# Altium PCB ESP_32_devolpment_board_PCB.PcbDoc
Units mil, origin at the board's own origin, x right, y up, seen from the top; angles counter-clockwise.
Board outline 2348 x 869 mil, 2 copper layers (Top Layer, Bottom Layer); 37 components, 68 nets, 177 pads, 50 vias.
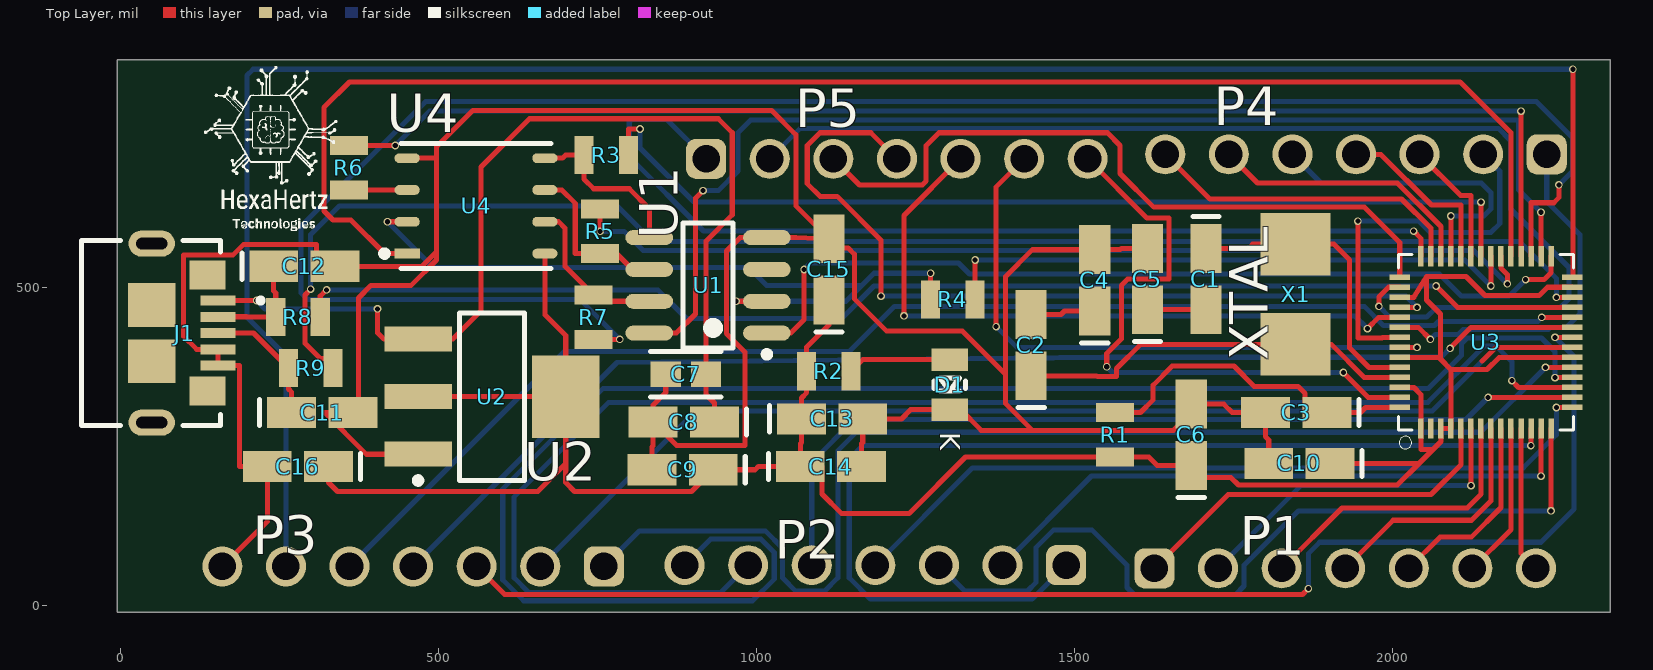
[diagram p0: Top Layer view]
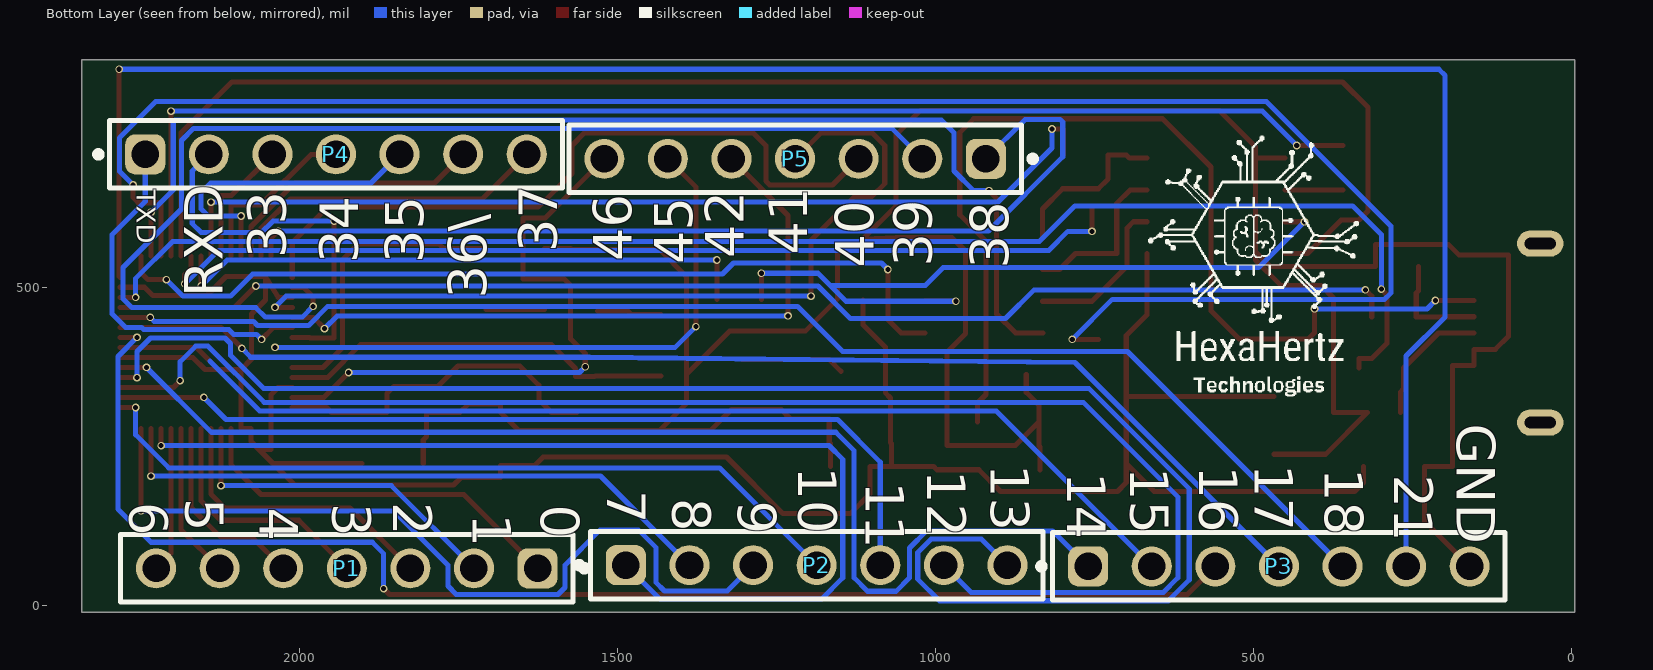
[diagram p1: Bottom Layer view, seen from below]
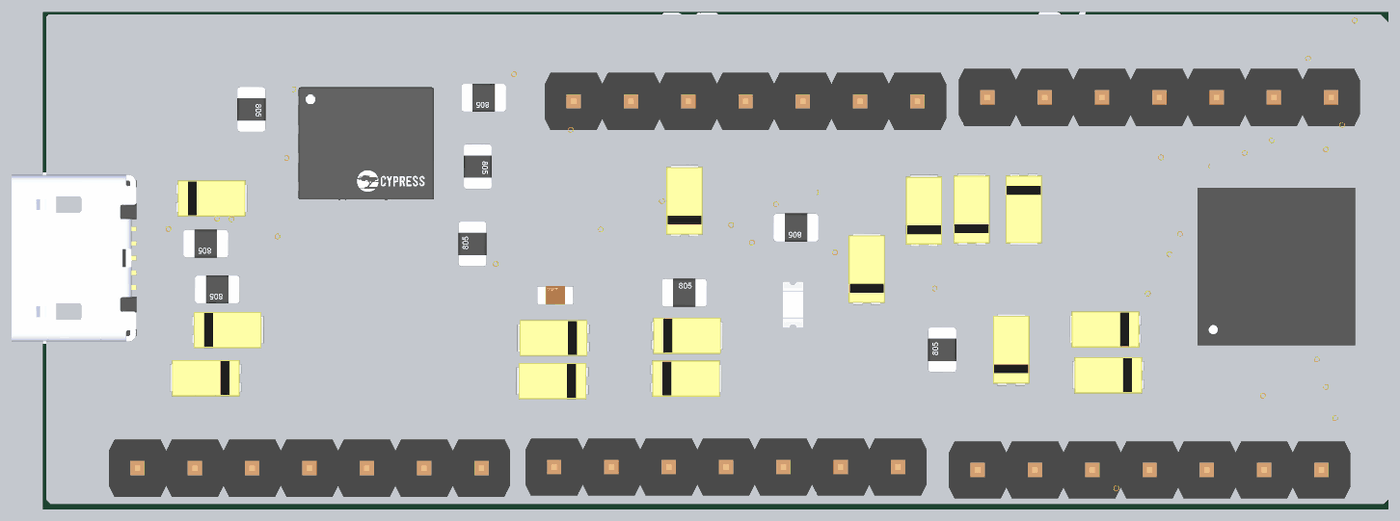
[diagram p2: 3D render of the assembled board from above, using the file's embedded part models]
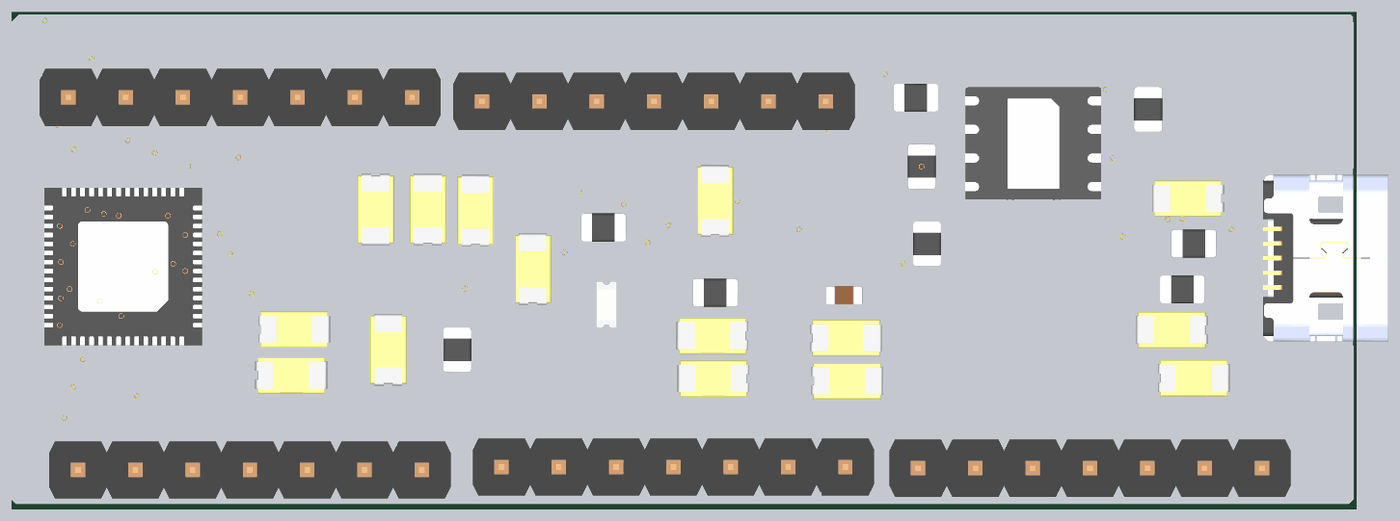
[diagram p3: 3D render of the assembled board from below, using the file's embedded part models]

## Layer stack, top to bottom
Top Solder: solder mask 0.4, Solder Resist, Dk 3.5
Top Layer: signal copper 1.4
Dielectric 1: dielectric 12.6, FR-4, Dk 4.8
Bottom Layer: signal copper 1.4
Bottom Solder: solder mask 0.4, Solder Resist, Dk 3.5

## Board outline
-5,-10 2343,-10 2343,859 -5,859

## Design rules (kind name [scope] priority, off if disabled: settings)
Clearance "Schematic Clearance Constraint_1" [All] p1: gap=5 ignorepadtopadclearanceinfootprint=FALSE except(6: SMDPad-SMDPad; 10: SMDPad-THPad THPad-THPad Text-Text)
Clearance "Schematic Clearance Constraint" [All] p2: gap=5 ignorepadtopadclearanceinfootprint=FALSE except(10: SMDPad-Text THPad-THPad Text-Text)
Clearance [All] p3: gap=5 ignorepadtopadclearanceinfootprint=FALSE except(10: THPad-THPad Fill-Fill Fill-Poly Fill-Region Fill-Text Poly-Poly Poly-Region Poly-Text Region-Region Region-Text Text-Text)
HoleSize [IsVia] p1: absolutevalues=TRUE maxlimit=12 minlimit=10 maxpercent=80.000 minpercent=20.000
PolygonConnect [All] p1: connectstyle=Relief reliefconductorwidth=10 reliefentries=4 polygonreliefangle="90 Angle" airgapwidth=10
RoutingVias [All] p1: holewidth=8 width=12 viastyle="Through Hole" minholewidth=8 minwidth=12 maxholewidth=8 maxwidth=12
SolderMaskExpansion [All] p1: expansion=2 istentingtop=FALSE
SupplyNets "Schematic Supply Nets_3" [InNet('+3V3')] p1: voltage=0.000
SupplyNets "Schematic Supply Nets_2" [InNet('GND')] p2: voltage=0.000
SupplyNets "Schematic Supply Nets" [InNet('+5V')] p3: voltage=0.000
Width [All] p1: maxlimit=8 minlimit=8 preferedwidth=8 minimp=50.000000 maximp=50.000000 favimp=50.000000
29 further rules are at their usual default settings.

## Components (designator, comment, footprint, x,y, rotation, side; value= is the part's Value field where it differs from the comment)
C1 "Capacitor" "C Tantal A" 1707,514 r270 top locked value=20pF
C2 "Capacitor" "C Tantal A" 1432,410 r90 top locked value=20pF
C3 "Capacitor" "C Tantal A" 1849,304 r180 top locked value=100nF
C4 "Capacitor" "C Tantal A" 1532,512 r90 top locked value=20pF
C5 "Capacitor" "C Tantal A" 1615,514 r90 top locked value=20pF
C6 "Capacitor" "C Tantal A" 1684,269 r90 top locked value=100n
C7 "10uF" FP-GRM188-0_1-e0_2_0_55-IPC_A 889,364 r180 top locked
C8 "Capacitor" "C Tantal A" 885.77,289 r180 top locked value=100nF
C9 "Capacitor" "C Tantal A" 884,214 r180 top locked value=10uF
C10 "Capacitor" "C Tantal A" 1854,224 r180 top locked value=100nF
C11 "Capacitor" "C Tantal A" 317.23,304 r0 top locked value=20pF
C12 "Capacitor" "C Tantal A" 289,534 r0 top locked value=20pF
C13 "Capacitor" "C Tantal A" 1119,294 r0 top locked value=10u
C14 "Capacitor" "C Tantal A" 1117.23,219 r0 top locked value=10u
C15 "Capacitor" "C Tantal A" 1114,529 r90 top locked value=1uF
C16 "Capacitor" "C Tantal A" 279,219 r180 top locked value=100nF
D1 "Light-Emitting Diode" LED0805 1304,348 r270 top locked
J1 "USB3076-XX-X_REVC5" GCT_USB3076-XX-X_REVC5 49,429 r270 top locked
P1 "61300711121" 61300711121 1926,59 r0 bottom locked
P2 "61300711121" 61300711121 1187,64 r180 bottom locked
P3 "61300711121" 61300711121 460,62 r180 bottom locked
P4 "61300711121" 61300711121 1943,710 r180 bottom locked
P5 "61300711121" 61300711121 1221,703 r0 bottom locked
R1 "Resistor" R0805 1564,269 r90 top locked value=10K
R2 "Resistor" R0805 1114,369 r0 top locked value=1K
R3 "Resistor" R0805 764,709 r180 top locked value=1K
R4 "Resistor" R0805 1309,482 r180 top locked value=1K
R5 "Resistor" R0805 754,589 r270 top locked value=1K
R6 "Resistor" R0805 359,689 r270 top locked value=1K
R7 "Resistor" R0805 744,454 r90 top locked value=1K
R8 "Resistor" R0805 279,454 r180 top locked value=1K
R9 "Resistor" R0805 299,374 r180 top locked value=1K
U1 "23K256T-I/SN" SOIC-SN8_L 924,504 r180 top locked
U2 "LM1117MP-3.3" MP04A_M 584,329 r0 top locked
U3 "ESP32-S2" QFN40P700X700X90-57T400N 2147.37,414.37 r90 top locked
U4 "FM25V20A-DG" FP-001-85579-IPC_C 559,629 r0 top locked
X1 "Crystal" Crystal_5x3.2mm 1848,490 r270 top locked

## Footprints (in the part's own frame and the unit in brackets; to place one, negate y for a bottom-side part, rotate by r counter-clockwise, add the part's x,y. Pads: shape width x height; smd on the part's side, far side on the other; paste and mask are expansions set on the pad)
61300711121 [mm] "Pin Header, pitch 2.54 mm, THT, Vertical, single row, 7p"
  rrect50% 1.6x1.6 hole 1.1: 1(-7.62,0)
  round 1.6 hole 1.1: 2(-5.08,0) 3(-2.54,0) 4(0,0) 5(2.54,0) 6(5.08,0) 7(7.62,0)
  silkscreen extent -9.61,-1.34 9.04,1.34, body extent -8.89,-1.27 8.89,1.27, height 8.57
"C Tantal A" [mm] "Molded Capacitor, 2-Leads, Body 3,2x1,6mm, IPC Medium Density"
  rect 1.95x1.25 smd: 1(-1.225,0) 2(1.225,0)
  silkscreen extent -2.5,-0.53 -2.5,0.53, body extent -1.6,-0.81 1.6,0.79, height 1.63
Crystal_5x3.2mm [mm]
  rect 2.5x2.8 smd: 1(-2,0) 2(2,0)
  body extent -2.58,-1.68 2.57,1.67, height 1.35
FP-001-85579-IPC_C [mil]
  rect 39.75x15.45 smd paste+0 mask+0: 1(-108.32,-75)
  rrect100% 39.75x15.45 smd paste+0 mask+0: 2(-108.32,-25) 3(-108.32,25) 4(-108.32,75) 5(108.32,75) 6(108.32,25) 7(108.32,-25) 8(108.32,-75)
  silkscreen extent -149,-98 118,98, body extent -119,-99 119,99, height 32
FP-GRM188-0_1-e0_2_0_55-IPC_A [mil]
  rect 47.57x39.85 smd paste+0 mask+0: 1(-31.57,0) 2(31.57,0)
  silkscreen extent -55,-36 55,36, body extent -75,-40 75,40, height 10
GCT_USB3076-XX-X_REVC5 [mm]
  rect 0.4x1.4 smd: 1(-1.3,2.65) 2(-0.65,2.65) 3(0,2.65) 4(0.65,2.65) 5(1.3,2.65)
  oval 1.05x1.85 hole 0.45 slot 1.252 at 90 deg: 6(-3.575,0) 7(3.575,0)
  rect 1.15x1.45 smd: 8(-2.32,2.23) 9(2.32,2.23)
  rect 1.75x1.9 smd: 10(-1.125,0) 11(1.125,0)
  silkscreen extent -3.7,-2.8 3.7,4.45, body extent -3.7,-2.78 3.7,2.78, height 2.66
LED0805 [mm] "LED SMD 0805"
  rect 0.9x1.45 smd: 1(-1,0) 2(1,0)
  silkscreen extent -0.25,-0.62 0.25,0.62, body extent -1.02,-0.46 1.04,0.45, height 0.85
MP04A_M [mm] "SOT223, 4-Leads, Body 6.5x3.5mm, Pitch 2.3mm, Lead Span 7mm, IPC Low Density"
  rect 2.7x1 smd: 1(-2.95,-2.3) 2(-2.95,0) 3(-2.95,2.3)
  rect 2.7x3.3 smd: 4(2.95,0)
  silkscreen extent -3.07,-3.47 1.3,3.35, body extent -1.86,-3.35 1.86,3.35, height 1.8
QFN40P700X700X90-57T400N [mm]
  rect 0.81x0.22 smd: 1(-3.445,2.6) 2(-3.445,2.2) 3(-3.445,1.8) 4(-3.445,1.4) 5(-3.445,1) 6(-3.445,0.6) 7(-3.445,0.2) 8(-3.445,-0.2) 9(-3.445,-0.6) 10(-3.445,-1) 11(-3.445,-1.4) 12(-3.445,-1.8) 13(-3.445,-2.2) 14(-3.445,-2.6) 29(3.445,-2.6) 30(3.445,-2.2) 31(3.445,-1.8) 32(3.445,-1.4) 33(3.445,-1) 34(3.445,-0.6) 35(3.445,-0.2) 36(3.445,0.2) 37(3.445,0.6) 38(3.445,1) 39(3.445,1.4) 40(3.445,1.8) 41(3.445,2.2) 42(3.445,2.6)
  rect 0.22x0.81 smd: 15(-2.6,-3.445) 16(-2.2,-3.445) 17(-1.8,-3.445) 18(-1.4,-3.445) 19(-1,-3.445) 20(-0.6,-3.445) 21(-0.2,-3.445) 22(0.2,-3.445) 23(0.6,-3.445) 24(1,-3.445) 25(1.4,-3.445) 26(1.8,-3.445) 27(2.2,-3.445) 28(2.6,-3.445) 43(2.6,3.445) 44(2.2,3.445) 45(1.8,3.445) 46(1.4,3.445) 47(1,3.445) 48(0.6,3.445) 49(0.2,3.445) 50(-0.2,3.445) 51(-0.6,3.445) 52(-1,3.445) 53(-1.4,3.445) 54(-1.8,3.445) 55(-2.2,3.445) 56(-2.6,3.445)
  rect 4x4 on Top Paste: " "(0,0)
  silkscreen extent -4.25,-3.5 3.5,3.5, body extent -3.5,-3.5 3.5,3.5, height 0.9
R0805 [mil]
  rect 30x60 smd: 1(-35,0) 2(35,0)
  body extent -39,-25 39,24, height 31
SOIC-SN8_L [mm] "SOIC, 8-Leads, Body 4.9x3.9mm, Pitch 1.27mm, IPC High Density"
  oval 1.9x0.6 smd: 1(-2.35,1.905) 2(-2.35,0.635) 3(-2.35,-0.635) 4(-2.35,-1.905) 5(2.35,-1.905) 6(2.35,-0.635) 7(2.35,0.635) 8(2.35,1.905)
  silkscreen extent -2.48,-2.5 1,2.88, body extent -2,-2.5 2,2.5, height 1.75

## Part data
C7: library part CMP-2006-02792-2, "Chip Multilayer Ceramic Capacitors for General Purpose, 0603, 10uF, X5R, 15%, 20%, 6.3V", Case Code (Imperial)=0603, Case Code (Metric)=1608, Dielectric=X5R, Max Operating Temperature=85°C, Min Operating Temperature=-55°C, Package Quantity=4000, Tolerance=20%, Voltage=6.3V, Capacitance=10uF, Case/Package=0603, Depth=0.8mm, Height=0.8mm, Lead Free="Lead Free", Length=1.6mm, Material=Ceramic, Mount="Surface Mount", Packaging="Tape and Reel", Radiation Hardening=No, REACH SVHC="No SVHC", Termination=SMD/SMT, Thickness=0.035inch, Voltage Rating=6.3V, Voltage Rating (DC)=6.3V, Width=0.031inch
D1: library part LED, AF=1, BV=0, BV_MAX=1e99, CJO=0, CJP=0, CTA=0, CTP=0, EG=1.11, FC=0.5, FCS=0.5, FV_MAX=1e99, IBV=0.001, IKF=0, IKR=0, IS=1e-14, ISR=1e-14, JSW=0, JTUN=0, JTUNSW=0, KEG=1, KF=0, LEVEL=1, MJSW=0.33, N=1, NBV=1, NR=1, NS=1, NTUN=30, PHP=1, RS=0, SimulationGenericComponent=True, TCV=0, TLEV=0, TLEVC=0, TM1=0, TM2=0, TNOM=27, TPB=0, TPHP=0, TRS=0, TRS2=0, TT=0, TTT1=0, TTT2=0, VJ=1, XTI=3, XTITUN=3
J1: "USB - micro B USB 2.0 Receptacle Connector 5 Position Surface Mount, Right Angle; Through Hole, 2.35mm profile, 5 Pins, Horizontal, Bottom mount", Package=None, Availability="In Stock", Check_prices=https://www.snapeda.com/parts/USB3076-30-A/Global+Connector+Technology/view-part/?ref=eda, MF="Global Connector Technology", MP=USB3076-30-A, Price=None, Purchase-URL=https://pricing.snapeda.com/search/part/USB3076-30-A/?ref=eda, SnapEDA_Link=https://www.snapeda.com/parts/USB3076-30-A/Global+Connector+Technology/view-part/?ref=snap
P1 P2 P3 P4 P5: library part CMP-1502-01074-3, Color=Black, Contact Resistance=20mΩ, Current Rating=3A, Operating Supply Voltage=250V, Connector Type="Male Pin", Contact Material=Copper, Contact Mating Length=5.9944mm, Contact Plating=Gold, Gender=Male, Lead Pitch=2.54mm, Mount="Through Hole", NexarPartId=32855531, Number of Contacts=7, Number of Pins=7, Number of Positions=7, Number of Rows=1, Orientation=Vertical, Packaging=Bulk, Pitch=2.54mm, REACH SVHC=Unknown, RoHS=Compliant, Termination=Solder
U1: library part CMP-0163-00013-1, "256K, 32768x8-bit, 3.6V SPI Serial SRAM, 8-Pin SOIC 3.9mm, Industrial TemperatureTape and Reel", Code_IPC=SOIC127P600-8, Code_JEDEC=MS-012, DatasheetVersion="revD, Apr-2009", PackageDescription="8-Lead Plastic Small Outline (SN) - Narrow, 3.90mm Body [SOIC]", PackageReference=SOIC-SN8, PackageVersion="revBB, Aug-2009"
U2: library part CMP-0062-01658-3, "800mA Low-Dropout Linear Regulator, 4-pin SOT-223", Manufacturer="National Semiconductor", PackageTopMarking=XYTT*N05A, PowerWise=N, Code_IPC=SOT223-4, Code_JEDEC=TO-261-AA, ComponentLink1Description="Manufacturer URL", ComponentLink1URL=http://www.national.com/, ComponentLink2Description="LM1117 Datasheet", ComponentLink2URL=http://www.national.com/ds/LM/LM1117.pdf, ComponentLink3Description="LM1117 Web Page", ComponentLink3URL=http://www.national.com/pf/LM/LM1117.html, ComponentLink4Description="MP04A Package Page", ComponentLink4URL=http://www.national.com/packaging/folders/mp04a.html, CompType="LDO IC", DatasheetVersion=Apr-2006, High-Reliability=Y, PackageDescription="Molded SOT-223, 6.50 x 3.56 x 1.6mm Body, 4 Lead, 2.3mm Pitch", PackageReference=MP04A, PackageVersion="revB, Apr-2003", PartNumber=LM1117MP-3.3, PinCount=4, RevisionNote="SCH symbol layout adjusted", RoHS=N
U3: "WiFi 802.11b/g/n Transceiver Module 2.412GHz ~ 2.484GHz Antenna Not Included Surface Mount", Package="QFN-56 Espressif Systems", Check_prices=https://www.snapeda.com/parts/ESP32-S2/Espressif+Systems/view-part/?ref=eda, MF="Espressif Systems", MP=ESP32-S2, SnapEDA_Link=https://www.snapeda.com/parts/ESP32-S2/Espressif+Systems/view-part/?ref=snap
U4: library part CMP-12949-000003-1, "IC FRAM 2M SPI 40MHZ 8TDFN", Ambient Temperature Range High=+85°C, Ambient Temperature Range Low=-40°C, Frequency=40MHz, Manufacturer="Cypress Semiconductor", Max Supply Voltage=3.6V, Min Supply Voltage=2V, Nominal Supply Current=2.4mA, Package=001-85579, Temperature="-40°C to +85°C", Access Time=9ns, Automotive=No, Category=IC, ComponentLink2Description=Datasheet, ComponentLink2URL=https://www.cypress.com/file/141396/download, Device Class L1="Integrated Circuits (ICs)", Device Class L2=Memory, Device Class L3=RAM, Digikey Description="IC FRAM 2M SPI 40MHZ 8TDFN", Height=0.8mm, Interface=SPI, Ipc Land Pattern Name=DFN500X600X75-8, Lead Free=Yes, Manufacturer Part Number=FM25V20A-DG, Memory Size=2Mbits, Memory Type=RAM, Mouser Description="F-RAM 2Mb, 40Mhz, 256K x 8 SPI FRAM", Octopart=https://octopart.com/fm25v20a-dg-cypress+semiconductor-50333481, RoHS=TRUE, Standoff Height=0mm, Temperature Range High=+85°C, Temperature Range Low=-40°C
C1 C2 C3 C4 C5 C6 C8 C9 C10 C11 C12 C13 C14 C15 C16: SimulationGenericComponent=True
R1 R2 R3 R4 R5 R6 R7 R8 R9: SimulationGenericComponent=True, TC1=0, TC2=0
X1: F0=40MEG, Q=50K, R=500, SimulationGenericComponent=True

## Via types
v1: diameter 12, hole 8, Top Layer to Bottom Layer, 50 vias

## Nets (pads, with @x,y where several pads share a name; then routed paths per layer and width w, separated by ;. In a path a pad name is that pad's centre, name@x,y a point inside that pad or via, vN(x,y) a via of type N, cw(c..) or ccw(c..) an arc to the next point about the centre after c; other vN are vias at no path point)
+3V3: C6.1 C9.1 C10.1 C13.1 C14.1 C15.1 C16.1 R1.1 R2.1 U2.2 U2.4 U3.1 U3.3 U3.4 U3.20 U3.27 U3.45 U3.51 U3.54 U4.8 | length 4003
  Top Layer w8: C16.1 327,219 327,194 341,180 656.14,180 700.14,224 ; U2.2 U2.4 ; U4.8 667.32,457.83 700.14,425 U2.4 ; C15.1 1114,442 1079,407 R2.1 1079,335.23 1070.77,327 C13.1 1070.77,256.77 1069,255 C14.1 ; C10.1 2042,224 ; U3.54 2034,343.5 2045,332.5 U3.1 2045,246 2064,246 ; U3.51 2073.25,390.75 2075.95,388.05 ; U3.45 2034,485.24 2054,518 ; U3.20 2168.25,390.75 2149,371.5 2092.25,371.5 ; U3.27 2243.98,500.98 2231,488 2146,488 2116,518 2054,518 ; 700.14,224 U2.4 ; 700.14,224 700.14,193.86 714,180 898,180 932,214 C9.1 998,214 1003,219 C14.1 ; C14.1 1103,219 1103,176 1134,145 1240,145 1329,234 R1.1 1617,234 1630.23,220.77 C6.1 1684,202 1746,202 1758,190 2008,190 2042,224 ; 2042,224 2064,246 ; 2054,518 2054,480.99 2075.95,459.04 2075.95,388.05 ; 2064,246 2076.5,258.5 U3.3 U3.4 2092.25,371.5 ; 2075.95,388.05 2092.25,371.5
+5V: C7.1 C8.1 J1.1 U2.3 | length 1618.4
  Top Layer w8: J1.1 v1(214,480.18) ; v1(404,467) 404,429.55 414,419.55 U2.3 522.55,419.55 567,464 567,690 643,766 940,766 962,744 962,615 920.57,573.57 C7.1 920.57,332.43 934,319 C8.1
  Bottom Layer w8: v1(214,480.18) 227.18,467 v1(404,467)
GND: C3.2 C4.2 C5.2 C6.2 C7.2 C8.2 C9.2 C10.2 C11.2 C12.2 C13.2 C14.2 C15.2 C16.2 D1.2 J1.4 J1.5 P3.7 U1.4 U2.1 U4.4 | length 5220.3
  Top Layer w8: P3.7 230.77,132.77 C16.2 187,219 187,377.82 J1.5 J1.4 119.59,403.41 99,424 99,552 177,552 193,568 308,568 308,534 C12.2 474,534 497,557 ; U4.4 497,704 ; U2.1 386.55,238.45 321,304 C11.2 374,304 374,484 394,504 457,504 497,544 497,557 ; C9.2 835.77,250 837.54,251.77 C8.2 ; C7.2 857.43,335.89 837.54,316 C8.2 ; C14.2 1165.46,255 1167.23,256.77 C13.2 1228,294 1242.63,308.63 D1.2 1321,308.63 1353.63,276 1434,276 ; C5.2 1574,562.23 1572,560.23 C4.2 1532,560 1434,560 1392,518 1392,364 ; C10.2 1805.77,261 1800.77,266 C3.2 1748.23,304 1735,317.23 C6.2 1684,304 1656,276 1434,276 ; 497,557 497,704 ; 497,704 497,722 554,779 1024,779 1062,741 1062,629.23 C15.2 ; C8.2 874.54,252 982,252 982,399 953,428 953,558 974,579 U1.4 1062,579 C15.2 ; C15.2 1114,563 1144,563 1154,553 1154,483 1205,432 1324,432 1392,364 ; 1392,364 1392,318 1434,276
GPIO0_1: P1.1 U3.5 | length 606.3
  Top Layer w8: P1.1 1742,175 2061,175 2108,222 U3.5
GPIO1_1: P1.2 U3.6 | length 541.3
  Top Layer w8: v1(2123.74,189) U3.6
  Bottom Layer w8: P1.2 1856,189 v1(2123.74,189)
GPIO2_1: P1.3 U3.7 | length 464.9
  Top Layer w8: P1.3 1921,154 2117.93,154 2139.49,175.56 U3.7
GPIO3_1: P1.4 U3.8 | length 386.7
  Top Layer w8: P1.4 2001.59,134.59 2124.52,134.59 2155.24,165.31 U3.8
GPIO4_1: P1.5 U3.9 | length 308.6
  Top Layer w8: P1.5 2075,108 2124.16,108 2170.99,154.82 U3.9
GPIO5_1: P1.6 U3.10 | length 244.9
  Top Layer w8: P1.6 2186.74,119.74 U3.10
GPIO6_1: P1.7 U3.11 | length 229.5
  Top Layer w8: U3.11 2202.48,82.52 P1.7
GPIO7_1: P2.1 U3.12 | length 1671.2
  Top Layer w8: v1(2218,252) 2218.23,252.23 U3.12
  Bottom Layer w8: P2.1 1433.5,10.5 1179.5,10.5 1146,44 1146,230.46 1167.54,252 v1(2218,252)
GPIO8_1: P2.2 U3.13 | length 979.7
  Top Layer w8: v1(2233.98,204) U3.13
  Bottom Layer w8: P2.2 1527,204 v1(2233.98,204)
GPIO9_1: P2.3 U3.14 | length 1316.7
  Top Layer w8: v1(2249.73,149.4) U3.14
  Bottom Layer w8: P2.3 1327.5,23.5 1426.5,23.5 1440,37 1440,92 1467,119 1528,119 1583,64 1583,29 1594,18 1754,18 1767,31 1767,64 1852.4,149.4 v1(2249.73,149.4)
GPIO10_1: P2.4 U3.15 | length 1223.9
  Top Layer w8: v1(2257.99,312.01) U3.15
  Bottom Layer w8: P2.4 1340,217 2206,217 2257.99,268.99 v1(2257.99,312.01)
GPIO11_1: P2.5 U3.16 | length 1400.1
  Top Layer w8: v1(2150.76,327.76) U3.16
  Bottom Layer w8: P2.5 1087,226 1154,293 2116,293 v1(2150.76,327.76)
GPIO12_1: P2.6 U3.17 | length 2329.3
  Top Layer w8: v1(2188,354.09) 2198.58,343.5 U3.17
  Bottom Layer w8: P2.6 944,21 642,21 619,44 619,171.39 767.61,320 2055.95,320 2144.33,408.38 2163.62,408.38 2188,384 v1(2188,354.09)
GPIO13_1: P2.7 U3.18 | length 2647.7
  Top Layer w8: v1(2256,359) 2256.25,359.25 U3.18
  Bottom Layer w8: P2.7 928,105 1007,105 1028,84 1028,42 994,8 634,8 601,41 601,184 759,342 2057,342 2108.92,393.92 2108.92,412.72 2117.58,421.38 2234.62,421.38 2256,400 v1(2256,359)
GPIO14_1: P3.1 U3.19 | length 1876
  Top Layer w8: v1(2241,375) U3.19
  Bottom Layer w8: P3.1 816,118 1014,118 1041,91 1041,44 1062,23 1107,23 1128,44 1128,244 1157,273 2139,273 v1(2241,375)
GPIO15_1: P3.2 U3.21 | length 1765.7
  Top Layer w8: 2141.24,384.74 2163,406.5 U3.21
  Bottom Layer w8: P3.2 904.5,306.5 2063,306.5 2141.24,384.74
GPIO16_1: P3.3 U3.22 | length 2141.6
  Top Layer w8: P3.3 604,18 1859,18 v1(1868,27) ; v1(2256,422.24) U3.22
  Bottom Layer w8: v1(1868,27) 1868,82 1886,100 2234,100 2286,152 2286,392.24 v1(2256,422.24)
GPIO17_1: P3.4 U3.23 | length 1975.4
  Top Layer w8: v1(2090.97,404.97) 2123.99,437.99 U3.23
  Bottom Layer w8: P3.4 780.76,382.76 1544.44,391 2077,391 v1(2090.97,404.97)
GPIO18_1: P3.5 U3.24 | length 2110.1
  Top Layer w8: v1(2235.13,453.74) U3.24
  Bottom Layer w8: P3.5 698,400 1146,400 1217,471 1956,471 1986,441 2066.49,441 2072.87,447.38 2228.78,447.38 v1(2235.13,453.74)
GPIO21_1: P3.6 U3.28 | length 3214.2
  Top Layer w8: U3.28 2284,517.73 v1(2284,843.92)
  Bottom Layer w8: P3.6 260,393 199,454 199,834.31 208.61,843.92 v1(2284,843.92)
GPIO33_1: P4.3 U3.37 | length 202.6
  Top Layer w8: P4.3 2107.46,645.54 2123.18,645.54 2123.74,644.97 U3.37
GPIO34_1: P4.4 U3.38 | length 278.3
  Top Layer w8: P4.4 1982,710 2061.64,630.36 2108,630.36 U3.38
GPIO35_1: P4.5 U3.39 | length 493.2
  Top Layer w8: U3.39 v1(2092.25,613)
  Bottom Layer w8: P4.5 1888,665 2140,665 2155,650 2155,624 2144,613 v1(2092.25,613)
GPIO36_1: P4.6 U3.40 | length 427
  Top Layer w8: P4.6 1788,665 2008,665 2076.5,596.5 U3.40
GPIO37_1: P4.7 U3.41 | length 509.7
  Top Layer w8: P4.7 1713.05,639.95 2014.66,639.95 2060.75,593.87 U3.41
GPIO38_1: P5.1 U3.42 | length 1529.3
  Top Layer w8: v1(2033.62,589.38) 2045,578 U3.42
  Bottom Layer w8: P5.1 859,765 804,765 800,761 800,706.16 916.78,589.38 v1(2033.62,589.38)
GPIO39_1: P5.2 U3.44 | length 1851.8
  Top Layer w8: v1(1979,471) 1979,485.98 1994,500.98 U3.44
  Bottom Layer w8: P5.2 1069,751 2167,751 2186,732 2186,624 2278,532 2278,483 2264,469 2069,469 2054,454 1996,454 v1(1979,471)
GPIO40_1: P5.3 U3.43 | length 1126.4
  Top Layer w8: P5.3 1162,662 1261,662 1267,668 1267,724 1287,744 1552,744 1572,724 1572,680 1625.05,626.95 1956.17,626.95 2011.73,571.39 U3.43
GPIO41_1: P5.4 U3.46 | length 1344.7
  Top Layer w8: v1(1196,487) 1196,575 1127,644 1100,644 1080,664 1080,724 1100,744 1180,744 P5.4 ; U3.46 v1(2039,469.49)
  Bottom Layer w8: v1(1196,487) 2021.49,487 v1(2039,469.49)
GPIO42_1: P5.5 U3.47 | length 1079.2
  Top Layer w8: v1(1232,456) 1232,614 P5.5 ; v1(1961,436) 1978.74,453.74 U3.47
  Bottom Layer w8: v1(1232,456) 1941,456 v1(1961,436)
GPIO45_1: P5.6 U3.50 | length 985
  Top Layer w8: v1(1377,439) 1377,659 P5.6 ; U3.50 v1(2039,406.5)
  Bottom Layer w8: v1(1377,439) 1409.5,406.5 v1(2039,406.5)
GPIO46_1: P5.7 U3.55 | length 959.9
  Top Layer w8: P5.7 1614,610 1649,610 1649,514 1584,514 1574,504 1574,420 1551,397 v1(1551,376) ; v1(1923,367) 1962.24,327.76 U3.55
  Bottom Layer w8: v1(1551,376) 1560,367 v1(1923,367)
NetC1_2: C1.2 C5.1 | length 92
  Top Layer w8: C5.1 C1.2
NetC2_2: C2.2 C4.1 | length 102.3
  Top Layer w8: C2.2 1479,458.23 1484.54,463.77 C4.1
NetC3_1: C3.1 R1.2 U3.56 | length 542.6
  Top Layer w8: R1.2 1604,304 1624,324 1624,347 1654,377 1751,377 1783,345 1852,345 1863,334 1863,304 C3.1 1950,304 1958.01,312.01 U3.56
NetC11_1: C11.1 J1.3 R9.2 | length 205.5
  Top Layer w8: J1.3 209,429 R9.2 264,341 269,336 C11.1
NetC12_1: C12.1 J1.2 R8.2 | length 172.3
  Top Layer w8: J1.2 198,454.59 198.59,454 R8.2 244,492 240.77,495.23 C12.1
NetD1_1: D1.1 R2.2 | length 162.6
  Top Layer w8: R2.2 1167.37,387.37 D1.1
NetJ1_6: J1.6
NetJ1_7: J1.7
NetJ1_8: J1.8
NetJ1_9: J1.9
NetJ1_10: J1.10
NetJ1_11: J1.11
NetR3_1: R3.1 U3.36 | length 1531.8
  Top Layer w8: R3.1 799,750 v1(817,750) ; U3.36 v1(2139.49,635)
  Bottom Layer w8: v1(817,750) 817,719.87 901.87,635 v1(2139.49,635)
NetR4_1: R4.1 U3.35 | length 937.1
  Top Layer w8: R4.1 v1(1344,544) ; v1(2155,503) 2155.24,503.24 U3.35
  Bottom Layer w8: v1(1344,544) 2114,544 v1(2155,503)
NetR5_1: R5.1 U3.34 | length 1544.2
  Top Layer w8: v1(754,589) R5.1 ; U3.34 2170.99,531 2181,520.99 v1(2181,506.26)
  Bottom Layer w8: v1(754,589) 792,589 822,559 2128.26,559 v1(2181,506.26)
NetR6_1: R6.1 U3.32 | length 2093.8
  Top Layer w8: R6.1 v1(432,724) ; U3.32 v1(2202.48,778)
  Bottom Layer w8: v1(432,724) 486,778 v1(2202.48,778)
NetR7_1: R7.1 U3.31 | length 3015.8
  Top Layer w8: R7.1 v1(785,419) ; U3.31 2218.23,634 2254,634 2262,642 v1(2262,662)
  Bottom Layer w8: v1(785,419) 722,482 293.79,482 284,491.79 284,597.21 479.79,793 2226.5,793 2283.5,736 2283.5,683.5 v1(2262,662)
NetU1_3: U1.3
NetU3_2: U3.2
RXD_1: P4.2 U3.49 | length 606.3
  Top Layer w8: v1(1946,605) 1946,421 1983.67,421 1984.91,422.24 U3.49
  Bottom Layer w8: v1(1946,605) 2042,605 2060,587 2155,587 2169,601 2169,684 P4.2
SPICLK_1: R5.2 U1.6 U4.6 | length 262.2
  Top Layer w8: U4.6 694,654 715,633 715,554 R5.2 780,554 805,529 U1.6
SPICS0_1: U3.33 U4.1 | length 2431.9
  Top Layer w8: U4.1 415,554 362,607 334,607 320,621 320,784 360,824 2106.74,824 2186.74,744 U3.33
SPICS1_1: U1.1 U3.29 | length 1387.9
  Top Layer w8: U1.1 1054,429 1075,450 v1(1075,529) ; v1(2209.73,513) 2238.73,513 2249.73,524 U3.29
  Bottom Layer w8: v1(1075,529) 1085,539 1318,539 1335,522 2074,522 2109,487 2183.73,487 v1(2209.73,513)
SPID_1: R3.2 U1.5 U4.5 | length 269.7
  Top Layer w8: U4.5 695,704 700,709 R3.2 729,671 744,656 800,656 832,624 832,579 U1.5
SPIHD_1: R7.2 U1.7 U4.7 | length 251.1
  Top Layer w8: U4.7 689,604 699,594 699,534 R7.2 754,479 U1.7
SPIQ_1: R4.2 U1.2 U4.2 | length 1232.2
  Top Layer w8: v1(419.81,604) U4.2 ; v1(968,479) U1.2 ; R4.2 v1(1274,523)
  Bottom Layer w8: v1(419.81,604) 491.81,532 988,532 1016,504 1166,504 ; v1(968,479) 1141,479 1166,504 ; v1(1274,523) 1185,523 1166,504
SPIW_1: R6.2 U4.3 | length 91.7
  Top Layer w8: R6.2 U4.3
TXD_1: P4.1 U3.48 | length 580.2
  Top Layer w8: U3.48 2041.01,437.99 v1(2060,419)
  Bottom Layer w8: v1(2060,419) 2068,427 2104,427 2111.38,434.38 2245.38,434.38 2249,438 2274,438 2295,459 2295,584 2243,636 P4.1
USB_D+_1: R9.1 U3.26 | length 2323.3
  Top Layer w8: v1(299,498) 290,489 290,413 314,389 334,389 R9.1 ; v1(2258,485.24) U3.26
  Bottom Layer w8: v1(299,498) 299,584 344,629 781,629 836.88,573.12 2199.88,573.12 2258,515 v1(2258,485.24)
USB_D-_1: R8.1 U3.25 | length 2059.8
  Top Layer w8: R8.1 314,487 v1(324,497) ; v1(2069,503) 2102.51,469.49 U3.25
  Bottom Layer w8: v1(324,497) 845,497 890,452 1134,452 1185,503 v1(2069,503)
VDD_SPI_1: U1.8 U3.30 | length 1874.8
  Top Layer w8: U1.8 874,429 904,459 904,641 v1(916,653) ; U3.30 v1(2234,619)
  Bottom Layer w8: v1(916,653) 940,653 971,684 971,744 991,764 2195.99,764 2199,760.99 2199,654 v1(2234,619)
XTALN_1: C1.1 U3.52 X1.1 | length 468.9
  Top Layer w8: C1.1 1774,562.23 1780.51,568.74 X1.1 1908.26,568.74 1933,544 1933,405.38 1963.38,375 U3.52
XTALP_1: C2.1 U3.53 X1.2 | length 630.1
  Top Layer w8: C2.1 1535.06,361.77 1536.19,360.64 1566.19,360.64 1566.19,373.19 1604.26,411.26 X1.2 1904,411.26 1956.01,359.25 U3.53
pads on no net: "U3. "

## Silkscreen, mask and mechanical layers (free items; w line width, h text height)
Top Overlay:
  drawing of 29 lines, arcs and shapes, not listed
  text "P4" at 1719,756 h60
  text "P5" at 1061,753 h60
  text "U4" at 419,745 h60
  text "U1" at 876,577 h60 r90
  text "XTAL" at 1804,386 h60 r90
  text "U2" at 635.18,197.11 h60
  text "P3" at 208,81 h60
  text "P1" at 1760,80 h60
  text "P2" at 1029,74 h60
Bottom Overlay:
  drawing of 28 lines, arcs and shapes, not listed
  text "TXD" at 2256,654 h30 r90
  text "37" at 1595,556 h60 r270
  text "41" at 1202,552 h60 r270
  text "42" at 1302,547 h60 r270
  text "33" at 2021,547 h60 r270
  text "46" at 1478,542 h60 r270
  text "35" at 1805,539 h60 r270
  text "34" at 1908,539 h60 r270
  text "45" at 1382,537 h60 r270
  text "39" at 1005,533 h60 r270
  text "40" at 1097,532 h60 r270
  text "38" at 885,530 h60 r270
  text "RXD" at 2121,485 h60 r270
  text "36\" at 1706,483 h60 r270
  text "GND" at 180,286 h60 r90
  text "17" at 498,223 h60 r90
  text "13" at 913,223 h60 r90
  text "16" at 585,220 h60 r90
  text "10" at 1216,219 h60 r90
  text "15" at 694,218 h60 r90
  text "18" at 388,216 h60 r90
  text "12" at 1013,213 h60 r90
  text "14" at 793,210 h60 r90
  text "21" at 279,206 h60 r90
  text "11" at 1110,195 h60 r90
  text "7" at 1516,182 h60 r90
  text "8" at 1414,169 h60 r90
  text "5" at 2180,169 h60 r90
  text "9" at 1311,165 h60 r90
  text "2" at 1853,163 h60 r90
  text "6" at 2268,163 h60 r90
  text "3" at 1949,161 h60 r90
  text "0" at 1621,159 h60 r90
  text "4" at 2063,154 h60 r90
  text "1" at 1728,145 h60 r90
Board Shape:
  lines w10: 1,6 1,851 5,855 2330,855 2342,843 2342,6 2335,-1 8,-1 1,6

## Text inside footprints (layer, text, board x,y; h text height)
D1: Top Overlay "K" at 1289,273 h31.5 r270